# Altium PCB z003.pcbdoc (part 2 of 2)
Units mil, origin at the board's own origin, x right, y up, seen from the top; angles counter-clockwise.
Board outline 7198.91 x 3074 mil, 2 copper layers (Top Layer, Bottom Layer); 161 components, 182 nets, 536 pads, 602 vias.
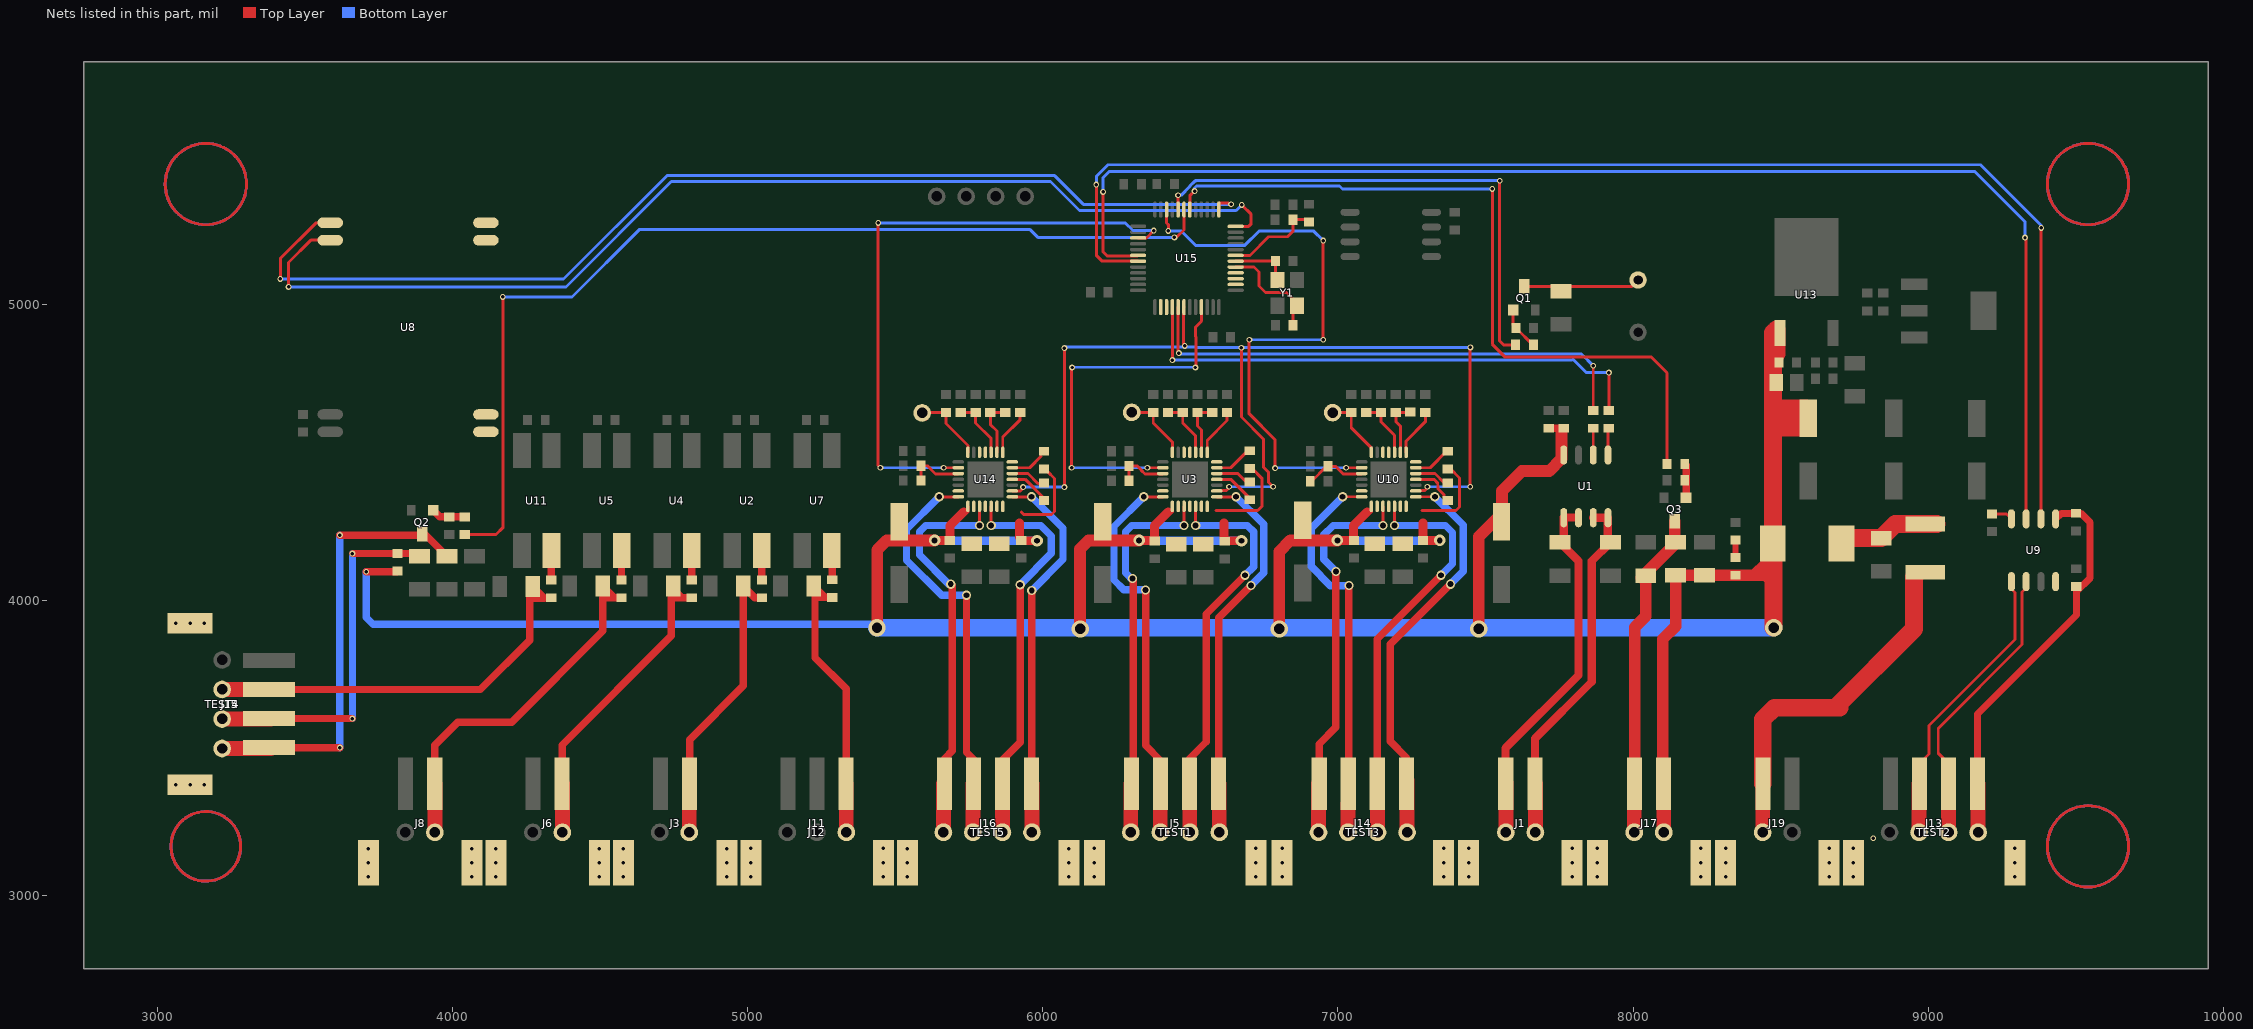
[diagram p2: the nets of this part, all layers, seen from the top]

## Via types
v1: diameter 19.68, hole 11.81, Top Layer to Bottom Layer, 561 vias
v2: diameter 31.5, hole 19.68, Top Layer to Bottom Layer, 25 vias
v3: diameter 39.37, hole 19.68, Top Layer to Bottom Layer, 10 vias
v4: diameter 59.06, hole 35.43, Top Layer to Bottom Layer, 6 vias

## Nets (pads, with @x,y where several pads share a name; then routed paths per layer and width w, separated by ;. In a path a pad name is that pad's centre, name@x,y a point inside that pad or via, vN(x,y) a via of type N, cw(c..) or ccw(c..) an arc to the next point about the centre after c; other vN are vias at no path point) (continued)
MOTOR_EN: U3.2 U10.2 U14.2 U15.42 | length 3546
  Top Layer w10: U14.2@5896.54,4369.63 5909.13,4369.63 5909.5,4370 5924,4370 5935,4381 v1(5933,4383) ; v1(6073,4383) v1(6073,4854) ; U15.42@6478.16,4992.65 6477,4991.49 6477,4865 v1(6481,4861) ; U3.2@6594.54,4370.63 6607.13,4370.63 6607.5,4371 6622,4371 6633,4382 v1(6631,4384) ; v1(6673,4855) 6673,4620 6747,4546 6747,4451 6765,4433 6765,4399 v1(6780,4384) ; U10.2@7266.54,4370.63 7279.13,4370.63 7279.5,4371 7294,4371 7305,4382 v1(7303,4384) ; v1(7448,4384) 7448,4855 v1(7449,4856)
  Bottom Layer w10: v1(5933,4383) v1(6073,4383) ; v1(6073,4854) 6076.84,4857.84 v1@6481,4857.84 ; v1(6481,4861) v1@6481,4857.84 ; v1(6631,4384) v1(6780,4384) ; v1(7303,4384) v1(7448,4384) ; v1(7449,4856) 6673,4856 6519,4856 6517.16,4857.84 v1@6481,4857.84
MOTOR_STEP_1: U3.16 U15.45 | length 1280.6
  Top Layer w10: v1(6097.37,4448.37) v1@6097.37,4788 ; v1(6354.37,4448.37) U3.16@6406.46,4448.37 ; v1(6517,4788) 6518.69,4789.69 6518.69,4891.48 6517,4893.16 6517,4924.63 6537.21,4944.84 U15.45@6537.21,4992.65
  Bottom Layer w10: v1(6097.37,4448.37) v1(6354.37,4448.37) ; v1(6099,4788) 6099.84,4788.84 6136.63,4788.84 v1@6516.16,4788.84
MOTOR_STEP_2: U10.16 U15.22 | length 2006.3
  Top Layer w10: U15.22@6419.1,5323.35 6419.1,5277.9 6425,5272 v1(6425,5251) ; v1@6696,4878 v1(6700,4882) ; v1@6699,4878 6699,4631 6786.62,4543.38 v1(6786.62,4447.38) ; v1(6950,4882) v1(6950,5218) ; v1(7027.62,4448.38) U10.16@7080.46,4448.38
  Bottom Layer w10: v1(6425,5251) 6425.84,5250.16 6465.63,5250.16 6466.48,5251 6468,5251 6517,5202 6684,5202 6732,5250 6918,5250 v1(6950,5218) ; v1(6700,4882) v1(6950,4882) ; v1(6786.62,4447.38) v1(7027.62,4448.38)
MOTOR_STEP_3: U14.16 U15.27 | length 2102.7
  Top Layer w10: v1(5442,5278) 5442,4456 v1(5449.63,4448.37) ; v1(5663.37,4448.37) U14.16@5713.46,4448.37 ; U15.27@6322.65,5226.9 6350.9,5226.9 v1(6376,5252)
  Bottom Layer w10: v1@5444,5277 6280,5277 6305,5252 v1(6376,5252) ; v1(5449.63,4448.37) v1(5663.37,4448.37)
NETBEEP1_2: BEEP1.2 D1.1 Q1.c | length 394.4
  Top Layer w10: Q1.c@7631.5,5063 7995.42,5063 BEEP1.2@8017,5084.58
NetBEEP1_2: 
NETC3_1: C3.1 U15.5 Y1.1 | length 367.8
  Top Layer w10: U15.5@6653.35,5128.47 6715.53,5128.47 6732,5112 6732,5064 6754,5042 6826,5042 6861.46,5006.54 Y1.1@6861.46,4997.69 6848,4984.23 C3.1@6848,4931
NetC3_1: 
NETC4_1: C4.1 U15.6 Y1.3 | length 205.9
  Top Layer w10: U15.6@6653.35,5148.16 C4.1@6778.69,5148.16 ; Y1.3@6778.69,5100.16 Y1.3@6788,5090.84 ; C4.1@6788,5149 Y1.3@6788,5090.84 ; Y1.3@6794.54,5084.31 Y1.3@6788,5090.84
NetC4_1: 
NETC9_1: C9.1 U3.4 | length 143
  Top Layer w10: U3.4@6589.54,4409 6637,4409 6701,4345 C9.1@6701,4340
NetC9_1: 
NETC9_2: C9.2 U3.5 | length 123.3
  Top Layer w10: U3.5@6589.54,4428.69 6660.31,4428.69 6689,4400 C9.2@6701,4400
NetC9_2: 
NETC11_2: C11.2 R9.1 U15.7 | length 325.6
  Top Layer w10: U15.7@6653.35,5167.84 6701.84,5167.84 6765,5231 6829,5231 6847,5249 R9.1@6847,5289 6894,5289 C11.2@6902,5281
NetC11_2: 
NETC12_2: C12.2 U3.8 | length 163.2
  Top Layer w10: U3.8@6557.06,4500.54 6557.06,4541.06 6624,4608 C12.2@6624,4636.02
NetC12_2: 
NETC13_2: C13.2 U3.6 | length 135.3
  Top Layer w10: U3.6@6589.54,4448.37 6636.37,4448.37 6694,4506 C13.2@6701,4506
NetC13_2: 
NETC18_2: C18.2 U9.8 | length 73
  Top Layer w10: C18.2@9216,4292 9265,4292 U9.8@9282,4275
NetC18_2: 
NETC19_1: C19.1 U10.4 | length 267.8
  Top Layer w10: U10.4@7263.54,4409.01 7324.99,4409.01 ; C19.1@7372,4337 7360,4349 7360,4356.1 ; 7324.99,4409.01 7338,4396 ; 7324.99,4409.01 7338,4396 ; 7338,4396 7339.39,4376.7 ; 7338,4396 7339.39,4376.7 ; 7338,4396 7339.39,4376.7 ; 7339.39,4376.7 7360,4356.1 ; 7339.39,4376.7 7360,4356.1 ; 7339.39,4376.7 7360,4356.1
NetC19_1: 
NETC19_2: C19.2 U10.5 | length 121.6
  Top Layer w10: U10.5@7263.54,4428.69 7328.31,4428.69 7360,4397 C19.2@7372,4397
NetC19_2: 
NETC23_2: C23.2 U10.8 | length 162.4
  Top Layer w10: U10.8@7231.06,4500.54 7231.06,4539.06 7296,4604 C23.2@7296,4636.02
NetC23_2: 
NETC24_2: C24.2 U10.6 | length 131.5
  Top Layer w10: U10.6@7263.54,4448.38 7312.38,4448.38 7368,4504 C24.2@7372,4504
NetC24_2: 
NETC34_1: C34.1 U14.4 | length 142
  Top Layer w10: U14.4@5896.54,4409 5940.09,4409 6004,4345.09 C34.1@6004,4337
NetC34_1: 
NETC34_2: C34.2 U14.5 | length 121.4
  Top Layer w10: U14.5@5896.54,4428.69 5949.31,4428.69 5983,4395 C34.2@6004,4395
NetC34_2: 
NETC35_2: C35.2 U14.8 | length 159.9
  Top Layer w10: U14.8@5864.06,4500.54 5864.06,4552.06 5923,4611 C35.2@5923,4636
NetC35_2: 
NETC36_2: C36.2 U14.6 | length 113.5
  Top Layer w10: U14.6@5896.54,4448.37 5955.37,4448.37 5994,4487
NetC36_2: 
NETD2_1: D2.1 J17.1 J18.2 Q3.c TVS13.1 | length 1166
  Top Layer w39.37: J17.1@8006,3336 8006,3908 8043,3945 TVS13.1@8043,4082.9 ; TVS13.1@8027.95,4074.95 8141.5,4188.5 Q3.c@8141.5,4267
  Top Layer w50: J18.2@8004,3213 J17.1@8004,3377.65
NetD2_1: 
NETD3_1: D3.1 PTC1.2 TVS14.2 | length 350.1
  Top Layer w60: D3.1@8706.14,4192 8724.24,4210.1 TVS14.2@8841,4210.1 8888.59,4257.69 PTC1.2@8990,4257.69 PTC1.2@9029,4257.69
NetD3_1: 
NETJ1_1: J1.1 J2.2 TVS2.1 U1.5 U1.6 | length 1242.2
  Top Layer w27.56: J1.1@7568,3367 7568,3498 7815,3745 7815,4132.1 TVS2.1@7752,4195.1 ; TVS2.1@7765,4203 U1.5@7765,4279 ; U1.5@7765,4280 U1.6@7810,4280
  Top Layer w50: J2.2@7569,3215 J1.1@7569,3379.65
NetJ1_1: 
NETJ1_2: J1.2 J2.1 TVS1.2 U1.7 U1.8 | length 1226.4
  Top Layer w27.56: J1.2@7668,3369 7668,3531 7860,3723 7860,4132.1 TVS1.2@7923,4195.1 ; U1.7@7865,4279 7914,4279 TVS1.2@7914,4198
  Top Layer w50: J2.1@7669,3213 J1.2@7669,3377.65
NetJ1_2: 
NETJ3_2: J3.2 J4.2 R6.1 TVS3.1 | length 988.4
  Top Layer w25: J3.2@4803.02,3377.72 4803.02,3527.02 4985.1,3709.1 TVS3.1@4985.1,4047 5024.1,4008 R6.1@5048,4008
  Top Layer w50: J4.2@4801.8,3212.86 J3.2@4801.8,3377.5
NetJ3_2: 
NETJ5_1: J5.1 TEST1.1 U3.24 | length 1303
  Top Layer w10: v2(6478.31,4252.69) U3.24@6478.31,4317.46
  Top Layer w25: J5.1@6300.36,3377.86 6306,3383.5 v2@6306,4066
  Top Layer w50: TEST1.1@6298,3213 J5.1@6298,3377.65
  Bottom Layer w25: v2@6306,4066 6280,4092 6280,4231 6301.69,4252.69 v2(6478.31,4252.69)
  other v2: 6304,4073
NetJ5_1: 
NETJ5_2: J5.2 TEST1.2 U3.21 | length 1351.3
  Top Layer w10: v2(6341.68,4349.94) U3.21@6406.46,4349.94
  Top Layer w25: v2(6348,4034) 6348,3507 6398.79,3456.21 J5.2@6398.79,3377.86
  Top Layer w50: TEST1.2@6398,3213 J5.2@6398,3377.65
  Bottom Layer w25: v2(6341.68,4349.94) 6241,4249.26 6241,4068 6274,4035 6347,4035 v2(6348,4034)
NetJ5_2: 
NETJ5_3: J5.3 TEST1.3 U3.26 | length 1377.7
  Top Layer w10: v2(6517.69,4252.69) U3.26@6517.69,4317.46
  Top Layer w25: J5.3@6497.21,3377.86 6497.21,3463.21 6553,3519 6553,3952 v2(6685,4084)
  Top Layer w50: TEST1.3@6498,3213 J5.3@6498,3377.65
  Bottom Layer w25: v2(6517.69,4252.69) 6692.31,4252.69 6714,4231 6714,4113 v2(6685,4084)
NetJ5_3: 
NETJ5_4: J5.4 TEST1.4 U3.1 | length 1303.4
  Top Layer w10: U3.1@6589.54,4349.94 v2(6654.31,4349.94)
  Top Layer w25: J5.4@6595.64,3377.86 6595.64,3939.64 v2(6705,4049)
  Top Layer w50: TEST1.4@6598,3213 J5.4@6598,3377.65
  Bottom Layer w25: v2(6654.31,4349.94) 6748,4256.26 6748,4092 v2(6705,4049)
NetJ5_4: 
NETJ6_2: J6.2 J7.2 R8.1 TVS4.1 | length 1102.2
  Top Layer w25: J6.2@4371.02,3377.72 4371.02,3509.02 4741,3879 4741,4008 R8.1@4810,4008 4776,4008 4747.1,4036.9 TVS4.1@4747.1,4047
  Top Layer w50: J7.2@4371.8,3212.86 J6.2@4371.8,3377.5
NetJ6_2: 
NETJ8_2: J8.2 J9.2 R17.1 TVS5.1 | length 1280.3
  Top Layer w25: J8.2@3939.21,3377.57 3939.21,3508.21 4017,3586 4200,3586 4509,3895 4509,4008 R17.1@4572,4008 4548.1,4008 TVS5.1@4509.1,4047
  Top Layer w50: J9.2@3939.8,3212.86 J8.2@3939.8,3377.5
NetJ8_2: 
NETJ11_3: J11.3 J12.3 R22.1 TVS6.2 | length 976.1
  Top Layer w25: TVS6.2@5223.1,4047 5261.1,4009 R22.1@5286,4009 5228,4009 5228,3805 5333.43,3699.57 J11.3@5333.43,3377.86
  Top Layer w50: J12.3@5334,3213 J11.3@5334,3377.65
NetJ11_3: 
NETJ13_2: J13.2 TEST2.2 U9.1 | length 988
  Top Layer w10: J13.2@8970.79,3377.86 8970.79,3445.79 9003,3478 9003,3560 9003,3575 9294,3866 9294,4026 9282,4038 U9.1@9282,4062.4
  Top Layer w50: TEST2.2@8969,3213 J13.2@8969,3377.65
NetJ13_2: 
NETJ13_3: J13.3 TEST2.3 U9.2 | length 987.2
  Top Layer w10: J13.3@9069.21,3377.86 9069.21,3445.79 9034,3481 9034,3550 9034,3565 9318,3849 9318,4027 9332,4041 U9.2@9332,4062.4
  Top Layer w50: TEST2.3@9069,3213 J13.3@9069,3377.65
NetJ13_3: 
NETJ14_1: J14.1 TEST3.1 U10.24 | length 1326.5
  Top Layer w10: v2(7152.31,4252.69) U10.24@7152.31,4317.47
  Top Layer w25: J14.1@6936.36,3377.86 6936.36,3512.36 6993,3569 v2(6993,4097)
  Top Layer w50: TEST3.1@6934,3213 J14.1@6934,3377.65
  Bottom Layer w25: v2(6993,4097) 6952,4138 6952,4221 6983.69,4252.69 v2(7152.31,4252.69)
NetJ14_1: 
NETJ14_2: J14.2 TEST3.2 U10.21 | length 1337.1
  Top Layer w10: v2(7015.68,4349.95) U10.21@7080.46,4349.95
  Top Layer w25: J14.2@7034,3310 7037,3313 v2(7037,4049)
  Top Layer w50: TEST3.2@7034,3213 J14.2@7034,3310
  Bottom Layer w25: v2(7015.68,4349.95) 6909,4243.27 6909,4114 6974,4049 v2(7037,4049)
NetJ14_2: 
NETJ14_3: J14.3 TEST3.3 U10.26 | length 1392.2
  Top Layer w10: v2(7191.69,4252.69) U10.26@7191.69,4317.47
  Top Layer w25: J14.3@7133.21,3377.86 7133.21,3868.21 v2(7349,4084)
  Top Layer w50: TEST3.3@7134,3213 J14.3@7134,3377.65
  Bottom Layer w25: v2(7191.69,4252.69) 7364.31,4252.69 7388,4229 7388,4123 v2(7349,4084)
NetJ14_3: 
NETJ14_4: J14.4 TEST3.4 U10.1 | length 1380.8
  Top Layer w10: U10.1@7263.54,4349.95 v2(7328.31,4349.95)
  Top Layer w25: J14.4@7231.64,3377.86 J14.4@7231.64,3391.36 ; J14.4@7234,3389 J14.4@7231.64,3391.36 ; v2(7381,4054) 7177,3850 7177,3521 7231.64,3466.36 J14.4@7231.64,3391.36
  Top Layer w50: TEST3.4@7234,3213 J14.4@7234,3389
  Bottom Layer w25: v2(7328.31,4349.95) 7424,4254.27 7424,4097 v2(7381,4054)
NetJ14_4: 
NETJ15_2: J15.2 R30.1 TEST4.2 TVS10.2 | length 1365.6
  Top Layer w25: J15.2@3378,3696.85 4093.85,3696.85 4261,3864 4261,4006 4311.1,4006 TVS10.2@4271.1,4046
  Top Layer w50: TEST4.2@3219,3697 J15.2@3383.65,3697
NetJ15_2: 
NETJ15_3: J15.3 R34.1 TEST4.3 TVS9.1 | length 1237.7
  Top Layer w10: J15.3@3378,3598.43 J15.3@3412,3598.43
  Top Layer w25: J15.3@3412,3598.43 v1(3660.57,3598.43) ; v1(3660.57,4157.57) 3878.53,4157.57 TVS9.1@3888,4148.1
  Top Layer w50: TEST4.3@3219,3597 J15.3@3383.65,3597
  Bottom Layer w25: v1(3660.57,3598.43) v1(3660.57,4157.57)
NetJ15_3: 
NETJ15_4: J15.4 Q2.c TEST4.4 TVS8.1 | length 1520.7
  Top Layer w25: J15.4@3378,3500 v1(3618,3500) ; v1(3618,4220) 3892.6,4220 Q2.c@3896.5,4223.9 3905.1,4223.9 TVS8.1@3981,4148
  Top Layer w50: TEST4.4@3219,3497 J15.4@3383.65,3497
  Bottom Layer w25: v1(3618,3500) v1(3618,4220)
NetJ15_4: 
NETJ16_1: J16.1 TEST5.1 U14.24 | length 1356.6
  Top Layer w10: v2(5785.31,4252.69) U14.24@5785.31,4317.46
  Top Layer w25: J16.1@5666.74,3377.72 5666.74,3462.74 5693,3489 5693,4049 v2(5688,4054)
  Top Layer w50: TEST5.1@5663,3213 J16.1@5663,3377.65
  Bottom Layer w25: v2(5688,4054) 5681,4054 5582,4153 5582,4232 5602.69,4252.69 v2(5785.31,4252.69)
NetJ16_1: 
NETJ16_2: J16.2 TEST5.2 U14.21 | length 1390.8
  Top Layer w10: v2(5648.68,4349.94) U14.21@5713.46,4349.94
  Top Layer w25: v2(5741,4016) 5741,3484 5765.17,3459.83 J16.2@5765.17,3377.72
  Top Layer w50: TEST5.2@5763,3213 J16.2@5763,3377.65
  Bottom Layer w25: v2(5648.68,4349.94) 5538,4239.26 5538,4135 5657,4016 v2(5741,4016)
NetJ16_2: 
NETJ16_3: J16.3 TEST5.3 U14.26 | length 1356.3
  Top Layer w10: v2(5824.69,4252.69) U14.26@5824.69,4317.46
  Top Layer w25: J16.3@5863.59,3377.72 5863.59,3458.59 5923,3518 v2(5923,4052)
  Top Layer w50: TEST5.3@5863,3213 J16.3@5863,3377.65
  Bottom Layer w25: v2(5824.69,4252.69) 5993.31,4252.69 6029,4217 6029,4158 v2(5923,4052)
NetJ16_3: 
NETJ16_4: J16.4 TEST5.4 U14.1 | length 1289.8
  Top Layer w10: U14.1@5896.54,4349.94 v2(5961.31,4349.94)
  Top Layer w25: J16.4@5962.02,3377.72 v2(5962.02,4032.02)
  Top Layer w50: TEST5.4@5963,3213 J16.4@5963,3377.65
  Bottom Layer w25: v2(5961.31,4349.94) 6068,4243.26 6068,4138 v2(5962.02,4032.02)
NetJ16_4: 
NETJ19_1: J19.1 J20.1 PTC1.1 | length 1221.4
  Top Layer w20: J19.1@8438.79,3377.86 J19.1@8439,3377.65
  Top Layer w50: J20.1@8439,3213 J19.1@8439,3377.65
  Top Layer w60: J19.1@8439.79,3377.86 8439.79,3595.79 8479,3635 8700,3635 ; 8685,3635 8952,3902 8952,4078 PTC1.1@8958,4084
NetJ19_1: 
NETLED1_1: LED1.1 R45.1 | length 59
  Top Layer w19.68: R45.1@8347,4144 LED1.1@8347,4203
NetLED1_1: 
NETQ1_B: Q1.b R2.1 R4.2 | length 147.5
  Top Layer w10: Q1.b@7593.5,4983 7593.5,4931.5 R4.2@7603,4922 7660,4865 R2.1@7662,4865
NetQ1_b: 
NETQ2_B: Q2.b R35.1 R36.2 | length 115.6
  Top Layer w25: Q2.b@3934.5,4303.9 3956.5,4281.9 R36.2@3989,4281.9 R35.1@4041,4281.9
NetQ2_b: 
NETQ3_B: Q3.b R42.1 R43.2 | length 115.9
  Top Layer w25: R42.1@8175,4461 8179.5,4456.5 Q3.b@8179.5,4347
NetQ3_b: 
NETR1_2: R1.2 U1.1 | length 91.6
  Top Layer w10: U1.1@7915,4491.6 7915,4579 R1.2@7918,4582
NetR1_2: 
NETR3_2: R3.2 U1.2 | length 90.4
  Top Layer w10: U1.2@7865,4491.6 R3.2@7865,4582
NetR3_2: 
NETR6_2: R6.2 U2.2 | length 99.5
  Top Layer w25: U2.2@5047.5,4167.31 5048,4166.81 R6.2@5048,4068
NetR6_2: 
NETR8_2: R8.2 U4.2 | length 99.3
  Top Layer w25: R8.2@4810,4068 U4.2@4810,4167.31
NetR8_2: 
NETR10_1: R10.1 R12.1 U3.9 | length 191
  Top Layer w10: U3.9@6537.37,4500.54 6537.37,4576.63 6524,4590 R10.1@6524,4636.02 R12.1@6574,4636.02
NetR10_1: 
NETR11_2: R11.2 U3.23
NETR13_2: R13.2 U3.27
NETR15_1: R15.1 R16.1 U3.10 | length 203.6
  Top Layer w10: R16.1@6424,4636.02 R15.1@6474,4636.02 6474,4600 6517.69,4556.31 U3.10@6517.69,4500.54
NetR15_1: 
NETR17_2: R17.2 U5.2 | length 99.5
  Top Layer w25: R17.2@4572,4068 4572,4166.81 U5.2@4572.5,4167.31
NetR17_2: 
NETR18_1: R18.1 T1.1 U3.14 | length 235.4
  Top Layer w10: T1.1@6301,4636 R18.1@6374,4636.02 6374,4600 6438.94,4535.06 U3.14@6438.94,4500.54
NetR18_1: 
NETR19_1: R19.1 R20.1 U3.17 | length 176.3
  Top Layer w10: R19.1@6292,4404 R20.1@6292,4454 6320,4454 6333.53,4440.47 6333.53,4439.74 6345.74,4427.53 6405.31,4427.53 U3.17@6406.46,4428.69
NetR19_1: 
NETR22_2: R22.2 U7.2 | length 98.7
  Top Layer w25: U7.2@5285,4167.31 5286,4166.31 R22.2@5286,4069
NetR22_2: 
NETR23_1: R23.1 R25.1 U10.9 | length 191.2
  Top Layer w10: U10.9@7211.37,4500.54 7211.37,4589.63 7196,4605 R23.1@7196,4636.02 7244.02,4636.02 R25.1@7245,4637
NetR23_1: 
NETR24_2: R24.2 U10.23
NETR26_2: R26.2 U10.27
NETR28_1: R28.1 R29.1 U10.10 | length 204.4
  Top Layer w10: R29.1@7096,4636.02 R28.1@7146,4636.02 7146,4604 7191.69,4558.31 U10.10@7191.69,4500.54
NetR28_1: 
NETR30_2: R30.2 U11.2 | length 99.7
  Top Layer w25: R30.2@4334,4068 4334,4166.31 U11.2@4335,4167.31
NetR30_2: 
NETR31_1: R31.1 T2.1 U10.14 | length 231.6
  Top Layer w10: T2.1@6977,4636 R31.1@7045,4636 7045,4584 7112.94,4516.06 U10.14@7112.94,4500.54
NetR31_1: 
NETR32_1: R32.1 R33.1 U10.17 | length 206.6
  Top Layer w10: R32.1@6906,4402 6910,4402 6961,4453 R33.1@6966,4453 6992,4453 7017.46,4427.54 7079.31,4427.54 U10.17@7080.46,4428.69
NetR32_1: 
NETR37_1: R37.1 R39.1 U14.9 | length 194.7
  Top Layer w10: U14.9@5844.37,4500.54 5844.37,4572.63 5822,4595 R37.1@5822,4636 R39.1@5872,4636
NetR37_1: 
NETR38_2: R38.2 U14.23
NETR40_2: R40.2 U14.27
NETR41_1: R41.1 R44.1 U14.10 | length 207.3
  Top Layer w10: R44.1@5722,4636 R41.1@5772,4636 5772,4600 5824.69,4547.31 U14.10@5824.69,4500.54
NetR41_1: 
NETR46_1: R46.1 T3.1 U14.14 | length 287.2
  Top Layer w10: T3.1@5574,4634 5594,4614 T3.1@5605,4614 ; T3.1@5591,4634 5593,4636 R46.1@5672,4636 5672,4598 5745.94,4524.06 U14.14@5745.94,4500.54
NetR46_1: 
NETR47_1: R47.1 R48.1 U14.17 | length 188.3
  Top Layer w10: R47.1@5587,4405 R48.1@5587,4455 5609,4455 5636.47,4427.53 5712.31,4427.53 U14.17@5713.46,4428.69
NetR47_1: 
OUT1: R42.2 U15.18 | length 2562.9
  Top Layer w10: U15.18@6497.84,5323.35 6497.84,5370 6498,5370 v1(6514,5386) ; v1(7523,5393) 7523,4867 7567,4823 8062,4823 8115,4770 R42.2@8115,4461
  Bottom Layer w10: v1(6514,5386) 6514,5396 6521.26,5403.26 7005,5403.26 7015.26,5393 v1(7523,5393)
Out1: 
OUT2: R35.2 U15.19 | length 3414.6
  Top Layer w10: R35.2@4041,4221.9 4146.9,4221.9 4170,4245 v1(4170,5027) ; v1(6446,5229) 6453.16,5229 6478.16,5254 U15.19@6478.16,5323.35 U15.19@6478.84,5324.04
  Bottom Layer w10: v1(4170,5027) 4404,5027 4632,5255 5957,5255 5983,5229 v1(6446,5229)
Out2: 
OUT3: R2.2 U15.20 | length 1762.5
  Top Layer w10: v1(6458,5372) 6458,5323.83 U15.20@6458.47,5323.35 ; v1(7548,5421) 7548,4878 7561,4865 R2.2@7602,4865
  Bottom Layer w10: v1(6458,5372) 6469,5372 6498,5401 6498,5402.63 6514.63,5419.26 6516.26,5419.26 6518,5421 v1(7548,5421)
Out3: 
PUMP_BI: R1.1 U15.40 | length 1813.3
  Top Layer w10: v1(6439,4813) U15.40@6439,4998.43 ; R1.1@7918,4642 v1(7918,4771)
  Bottom Layer w10: v1(6439,4813) 7793,4813 7796,4816 7841,4771 v1(7918,4771)
PUMP_FI: R3.1 U15.41 | length 1732.2
  Top Layer w10: v1@6458.47,4833 U15.41@6458.47,4992.65 ; R3.1@7865,4642 v1(7865,4794)
  Bottom Layer w10: v1@6461,4834 7825,4834 v1(7865,4794)
  other v1: 6461,4837
UART1_RX: U9.6 U15.31 | length 4715.8
  Top Layer w10: v1(6181,5408) 6181,5168 6200.84,5148.16 6275.84,5148.16 U15.31@6322.65,5148.16 ; U9.6@9382,4275 v1@9382,5262
  Bottom Layer w10: v1(6181,5408) 6181,5435 6221,5475 9177,5475 9383,5269 v1(9383,5261)
UART1_TX: U9.7 U15.30 | length 4589.3
  Top Layer w10: v1(6204,5383) 6204,5180 6217.84,5166.16 6320.96,5166.16 U15.30@6322.65,5167.84 ; v1(9328,5228) 9327,5228 9332,5223 U9.7@9332,4275
  Bottom Layer w10: v1(6204,5383) 6204,5431 6225,5452 9158,5452 9328,5282 v1(9328,5228)
UART2_RX: U8.1 U15.13 | length 3767.6
  Top Layer w10: v1(3416,5088) 3416,5157 3537.44,5278.44 U8.1@3585,5278.44 ; U15.13@6596.27,5323.35 6596.27,5341.27 6601,5346 6627,5346 6638,5335 v1(6638,5341)
  Bottom Layer w10: v1(3416,5088) 4376,5088 4726,5438 6040,5438 6137,5341 v1(6638,5341)
UART2_TX: U8.2 U15.12 | length 3815
  Top Layer w10: v1(3444,5061) 3444,5144 3519.39,5219.39 U8.2@3585,5219.39 ; U15.12@6653.35,5266.27 6697.27,5266.27 6706,5275 6706,5307 v1(6674,5339)
  Bottom Layer w10: v1(3444,5061) 4384,5061 4741,5418 6026,5418 6123.84,5320.16 6655.16,5320.16 v1(6674,5339)
USB_5V: C20.2 C21.2 J13.4 TEST2.4 U9.5 | length 1345.5
  Top Layer w23.62: J13.4@9167.64,3377.86 9167.64,3613.64 9503,3949 9503,4029 9549,4075 9549,4263 9518,4294 C20.2@9501,4294 9451,4294 U9.5@9432,4275
  Top Layer w50: TEST2.4@9169,3213 J13.4@9169,3377.65
VCC: C1.1 C2.2 C13.1 C15.2 C16.2 C24.1 C25.2 C26.2 C27.1 C32.2 C36.1 C37.2 C38.2 D2.2 D3.2 EC1.1 EC2.1 EC3.1 EC6.1 EC7.1 J17.2 J18.1 R34.2 R45.2 TVS12.1 U1.4 U3.22 U3.28 U10.22 U10.28 U13.1 U14.22 U14.28 | length 13530
  Top Layer w10: 5731,4283.01 5745.94,4297.95 U14.22@5745.94,4317.46 ; 5927,4298 5935,4290 6029,4290 6039,4300 6039,4412 6016.5,4434.5 C36.1@6016.5,4443.5 ; v3(5980,4201) v3@5980,4202 ; 6424,4283.01 6438.94,4297.95 U3.22@6438.94,4317.46 ; 6587,4303 6728,4303 6742,4317 6742,4413 6711,4444 6711,4446 C13.1@6701,4446 ; 7098,4283.01 7112.94,4297.95 U10.22@7112.94,4317.47 ; 7285,4303 7400,4303 7412,4315 7412,4414 7382,4444 C24.1@7372,4444
  Top Layer w19.68: R45.2@8347,4084 8435,4084 ; 8399,4086 D3.2@8448.5,4135.5 ; 8424.1,4094.9 8435,4084 ; 8430,4096 8463.9,4129.9 ; 8440,4092 8473.9,4125.9 ; 8458,4061 8435,4084 ; 8463,4084 8435,4084
  Top Layer w25: v1(3707,4096) 3811,4096 R34.2@3813,4098 ; C1.1@7714,4582 C2.2@7765,4582
  Top Layer w30: 5523,4202 v3(5633,4202) C38.2@5685,4202 5685,4252.01 5732,4299.01 ; C37.2@5921,4212.99 5921,4261.98 ; C37.2@5936,4201 v3(5980,4201) ; 6227,4202 v3(6326,4202) 6378,4202 6378,4252.01 6425,4299.01 ; C15.2@6614,4212.99 6614,4261.98 ; C15.2@6629,4201 v3(6673,4201) ; 6903.99,4202.01 7052,4202.01 7052,4252.01 7099,4299.01 ; C25.2@7288,4212.99 7288,4261.98 ; C25.2@7301,4202 v3(7345,4202)
  Top Layer w39.37: J17.2@8101,3365 8101,3868 8144,3911 D2.2@8144,4083.9 ; D2.2@8148,4083.9 8433.9,4083.9 8456,4106
  Top Layer w40: v4(5438,3906) 5439,3907 5439,4170 5471,4202 v3(5633,4202) ; v4(6126,3902) 6126,4173 6155,4202 v3(6326,4202) ; v4(6801,3902) 6801,4164 6839,4202 v3(6998,4202) ; v4(7477,3902) 7477,4215 7556,4294 7556,4370 7623,4437 7716,4437 7757,4478 C2.2@7757,4574
  Top Layer w50: J18.1@8104,3213 J17.2@8104,3377.65
  Top Layer w60: 8473.86,4906 D3.2@8473.86,4192 8476,4189.86 v4(8476,3906) ; U13.1@8479,4910 8479,4828 8486,4835 U13.1@8486,4917 ; 8481,4649 EC6.1@8585,4649 ; 8489,4610 EC6.1@8593,4610 ; 8490,4584 EC6.1@8594,4584
  Bottom Layer w25: v1(3707,4096) 3707,3941 3730,3918 5426,3918 v4(5438,3906)
  Bottom Layer w30: v3@5633,4201 v3@5985,4201 ; v3@6326,4201 v3(6673,4201) ; v3@6998,4201 v3(7345,4202)
  Bottom Layer w60: v4(5438,3906) v4(8476,3906)
"": J1.0 J3.0 J5.0 J6.0 J8.0 J11.0 J13.0 J14.0 J15.0 J16.0 J17.0 J19.0 U3.7 U3.11 U3.12 U3.20 U3.25 U8.22 U8.23 U8.33 U8.34 U9.4 U10.7 U10.11 U10.12 U10.20 U10.25 U14.7 U14.11 U14.12 U14.20 U14.25 U15.2 U15.3 U15.4 U15.38 U15.39 | length 6679
  Top Layer w10: 3281.59,3165.48 ccw(c3163.48,3165.48) 3281.59,3165.48 ; 3301.28,5409.57 ccw(c3163.48,5409.57) 3301.28,5409.57 ; 9679.23,3165.48 ccw(c9541.43,3165.48) 9679.23,3165.48 ; 9679.23,5409.57 ccw(c9541.43,5409.57) 9679.23,5409.57
  Bottom Layer w10: 3281.59,3165.48 ccw(c3163.48,3165.48) 3281.59,3165.48 ; 3301.28,5409.57 ccw(c3163.48,5409.57) 3301.28,5409.57 ; 9679.23,3165.48 ccw(c9541.43,3165.48) 9679.23,3165.48 ; 9679.23,5409.57 ccw(c9541.43,5409.57) 9679.23,5409.57
  other v1: 3713.8,3061.86 4064.2,3061.86 4146.61,3062 4497,3062 4578.61,3062 4929,3062 5010.59,3062.14 5459.41,3062.14 5540.76,3062 6088,3062 6174.38,3062.14 6721.62,3062.14 6810.38,3062.14 7357.62,3062.14 7443.8,3062.14 7794.2,3062.14 7878.8,3062.14 8229.2,3062.14 8313.8,3062.14 8664.2,3062.14 8746.38,3062.14 9293.62,3062.14 3713.8,3109.86 4064.2,3109.86 4146.61,3110 4497,3110 4578.61,3110 4929,3110 5010.59,3110.14 5459.41,3110.14 5540.76,3110 6088,3110 6174.38,3110.14 6721.62,3110.14 6810.38,3110.14 7357.62,3110.14 7443.8,3110.14 7794.2,3110.14 7878.8,3110.14 8229.2,3110.14 8313.8,3110.14 8664.2,3110.14 8746.38,3110.14 9293.62,3110.14 3713.8,3157.86 4064.2,3157.86 4146.61,3158 4497,3158 4578.61,3158 4929,3158 5010.59,3158.14 5459.41,3158.14 5540.76,3158 6088,3158 6174.38,3158.14 6721.62,3158.14 6810.38,3158.14 7357.62,3158.14 7443.8,3158.14 7794.2,3158.14 7878.8,3158.14 8229.2,3158.14 8313.8,3158.14 8664.2,3158.14 8746.38,3158.14 9293.62,3158.14 8814.13,3193.12 3062.28,3374.02 3110.28,3374.02 3158.28,3374.02 3062.28,3921.26 3110.28,3921.26 3158.28,3921.26

## Polygon pours and split planes (outlines as drawn)
GND on Bottom Layer (solid, remove dead copper, pour order 0): 3006,3008 9698.91,3008 9698.91,5567.06 9692.97,5573 4715,5573 4281,5139 3002,5139
GND on Top Layer (solid, remove dead copper, pour order 1): 9698,3000 9698,5574 9694,5570 4718,5570 4288,5140 3000,5140 3000,3014 3006,3008

## Keep-outs
Board Outline Layer:
  circle w10 net "": c3163.48,3165.48 r61.02
  circle w10 net "": c3163.48,5409.57 r61.02
  circle w10 net "": c9541.43,5409.57 r61.02
  circle w10 net "": c9541.43,3165.48 r61.02
  lines w3.94 net "": 3006,3008 3006,5567.06 3229.94,5567.06 3481,5316 4224,5316 4475.06,5567.06 9698.91,5567.06 9698.91,3008 3006,3008
  lines w10 net "": 3102.46,3165.48 cw(c3163.48,3165.48) 3163.48,3226.5 cw(c3163.48,3165.48) 3224.5,3165.48 cw(c3163.48,3165.48) 3163.48,3104.46 cw(c3163.48,3165.48) 3102.46,3165.48 ; 3102.46,5409.57 ccw(c3163.48,5409.57) 3163.48,5348.55 ccw(c3163.48,5409.57) 3224.5,5409.57 ccw(c3163.48,5409.57) 3163.48,5470.6 ccw(c3163.48,5409.57) 3102.46,5409.57 ; 9480.41,3165.48 cw(c9541.43,3165.48) 9541.43,3226.5 cw(c9541.43,3165.48) 9602.46,3165.48 cw(c9541.43,3165.48) 9541.43,3104.46 cw(c9541.43,3165.48) 9480.41,3165.48 ; 9480.41,5409.57 cw(c9541.43,5409.57) 9541.43,5470.6 cw(c9541.43,5409.57) 9602.46,5409.57 cw(c9541.43,5409.57) 9541.43,5348.55 cw(c9541.43,5409.57) 9480.41,5409.57

## Other copper
Top Layer:
  drawing of 555 lines, arcs and shapes, not listed
Bottom Layer:
  drawing of 99 lines, arcs and shapes, not listed

## Silkscreen, mask and mechanical layers (free items; w line width, h text height)
Top Silkscreen Layer:
  circle w10 net "": c9541.43,3165.48 r137.8
  circle w10 net "": c3163.48,3165.48 r118.11
  circle w10 net "": c3163.48,5409.57 r137.8
  circle w10 net "": c9541.43,5409.57 r137.8
  region net "": 3589,4658 4108,4658 4108,5190 3589,5190
  lines w10 net "": 3348.47,3352.36 3692.1,3352.36 ; 3348.47,3942.91 3690,3942.91 ; 3692.1,3698.72 3692.1,3942.91 ; 3692.15,3348.05 3692.15,3698.58 4085.85,3698.58 4085.85,3348.05 ; 4124.95,3348.19 4124.95,3698.72 4518.65,3698.72 4518.65,3348.19 ; 4556.95,3348.19 4556.95,3698.72 4950.65,3698.72 4950.65,3348.19 ; 4988.94,3348.33 4988.94,3698.87 5481.06,3698.87 5481.06,3348.33 ; 5519.1,3348.19 5519.1,3698.72 6109.65,3698.72 6109.65,3348.19 ; 6152.72,3348.33 6152.72,3698.87 6743.28,3698.87 6743.28,3348.33 ; 6788.72,3348.33 6788.72,3698.87 7379.28,3698.87 7379.28,3348.33 ; 7418.3,3698.87 7812,3698.87 7812,3348.33 ; 7422.15,3348.33 7422.15,3698.87 ; 7857.15,3348.33 7857.15,3698.87 8250.85,3698.87 8250.85,3348.33 ; 8292.15,3348.33 8292.15,3698.87 8685.85,3698.87 8685.85,3348.33 ; 8724.72,3348.33 8724.72,3698.87 ; 8724.72,3698.72 9315.28,3698.72 9315.28,3458.28 9315.28,3348.33
  text "MMDY_V1.1_20220328" at 4378,5309 h118.11
  text "DIO" at 5769,5164 h98.43 r90
  text "3V3" at 5974,5163 h98.43 r90
  text "CLK" at 5672,5143 h98.43 r90
  text "GND" at 5872,5124 h98.43 r90
  text "暂停开关" at 3047,3999 h118.11
  text "X轴电机" at 6253,3745 h118.11
  text "X零" at 4259,3742 h118.11
  text "Y轴电机" at 6900,3742 h118.11
  text "水位" at 5141,3741 h118.11
  text "Z轴电机" at 5617,3739 h118.11
  text "Z零" at 3831,3736 h118.11
  text "Y零" at 4662,3734 h118.11
  text "水泵" at 7525,3734 h118.11
  text "UV灯" at 7941,3734 h118.11
  text "DC" at 8420,3728 h118.11
  text "USB" at 8907,3726 h118.11
  text "L" at 3550,3589 h196.85
  text "D" at 7567,3528 h196.85
  text "J" at 4288.8,3525.86 h196.85
  text "A" at 8959,3526 h196.85
  text "E" at 7019,3524 h196.85
  text "C" at 8012,3524 h196.85
  text "B" at 8448,3524 h196.85
  text "H" at 5174,3521 h196.85
  text "K" at 3846.8,3518.86 h196.85
  text "I" at 4704.8,3518.86 h196.85
  text "F" at 6440,3519 h196.85
  text "G" at 5758,3517 h196.85

## Text inside footprints (layer, text, board x,y; h text height)
BEEP1: Top Silkscreen Layer "+" at 7967.79,4877.89 h32 r90